# Altium PCB PowerSwitch.PcbDoc
Units mm, origin at the board's own origin, x right, y up, seen from the top; angles counter-clockwise.
Board outline 65 x 35 mm, 4 copper layers (Top Layer, GND Plane, Power Plane, Bottom Layer), stack 1.57 mm thick; 14 components, 13 nets, 41 pads, 5 vias.
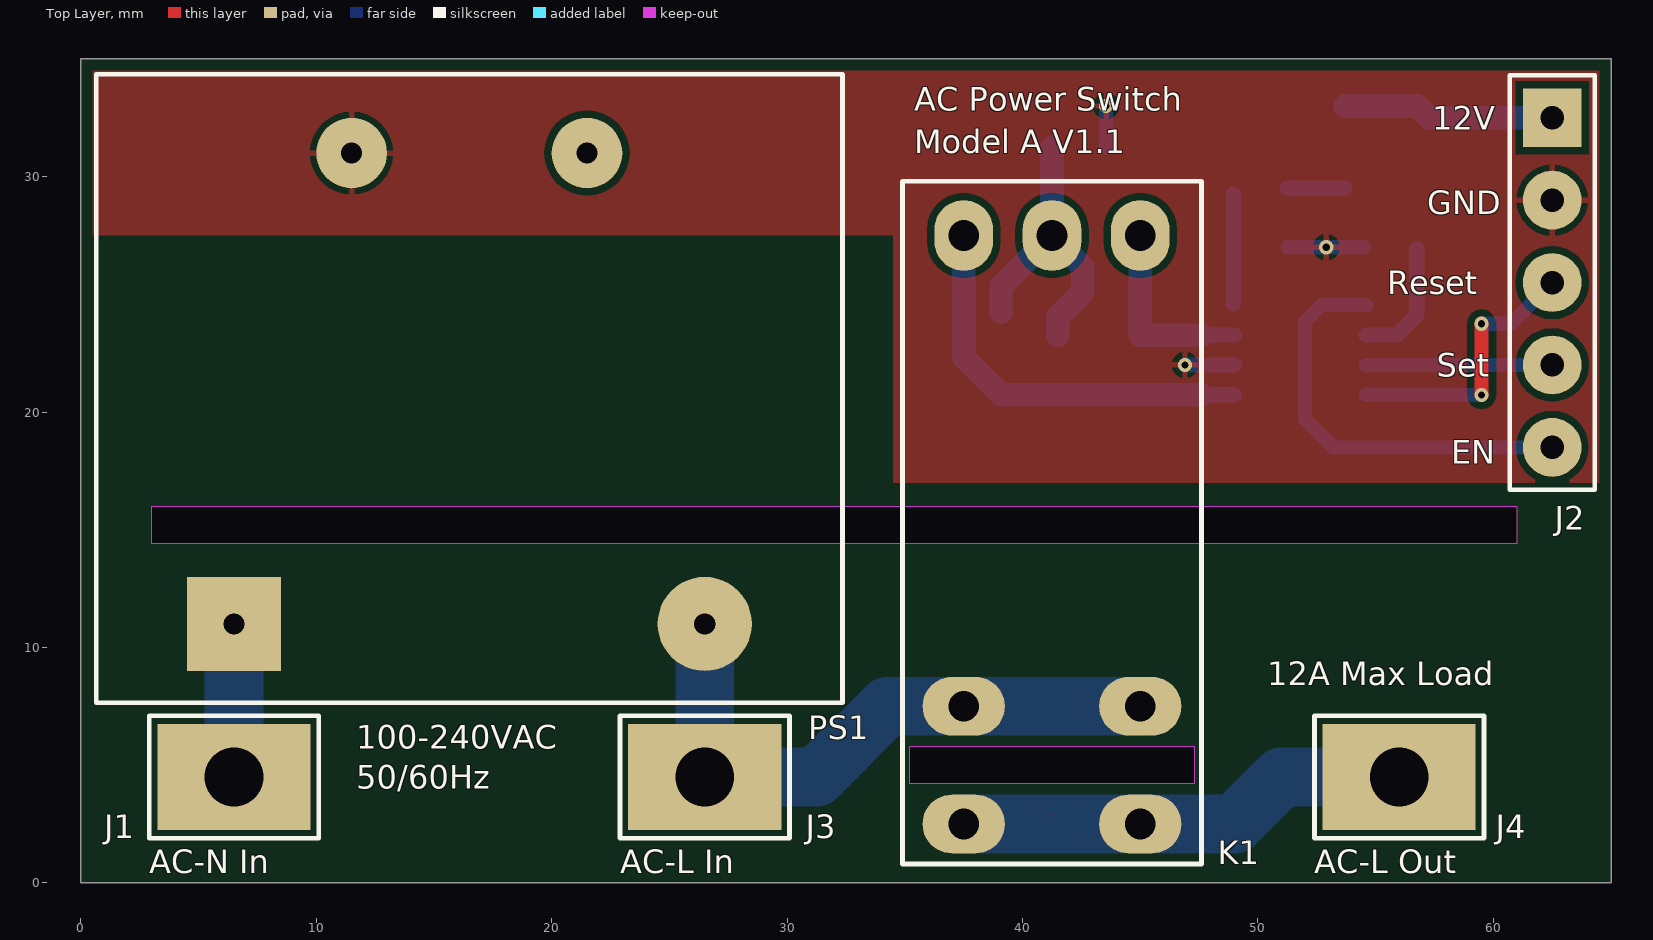
[diagram p0: Top Layer view]
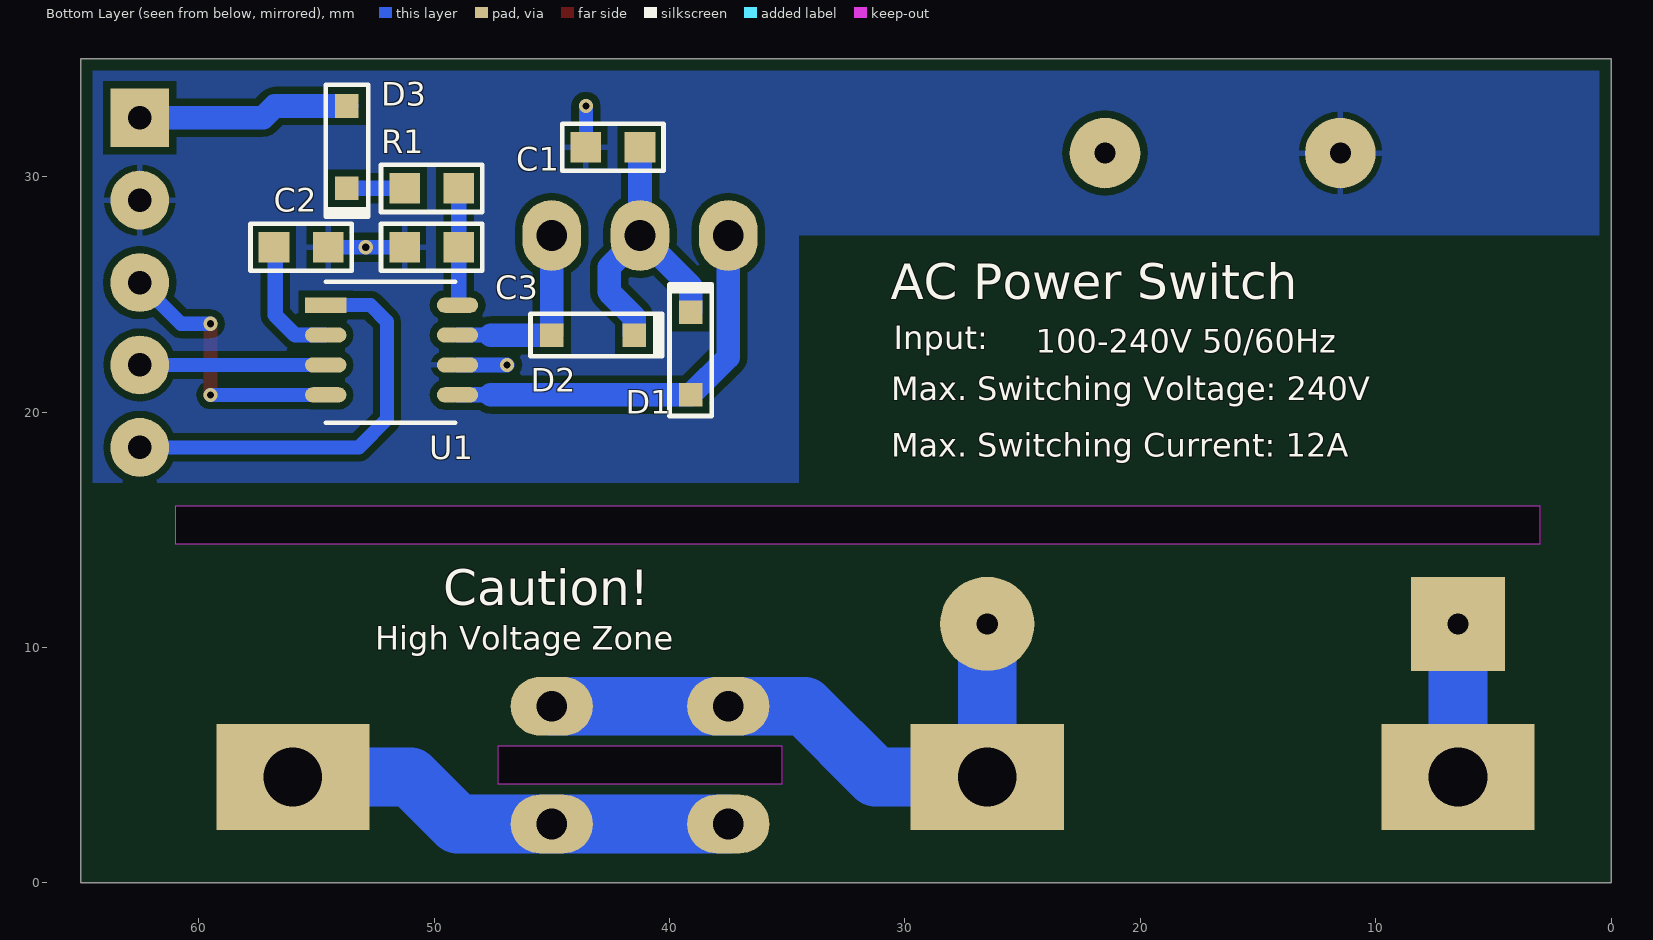
[diagram p1: Bottom Layer view, seen from below]
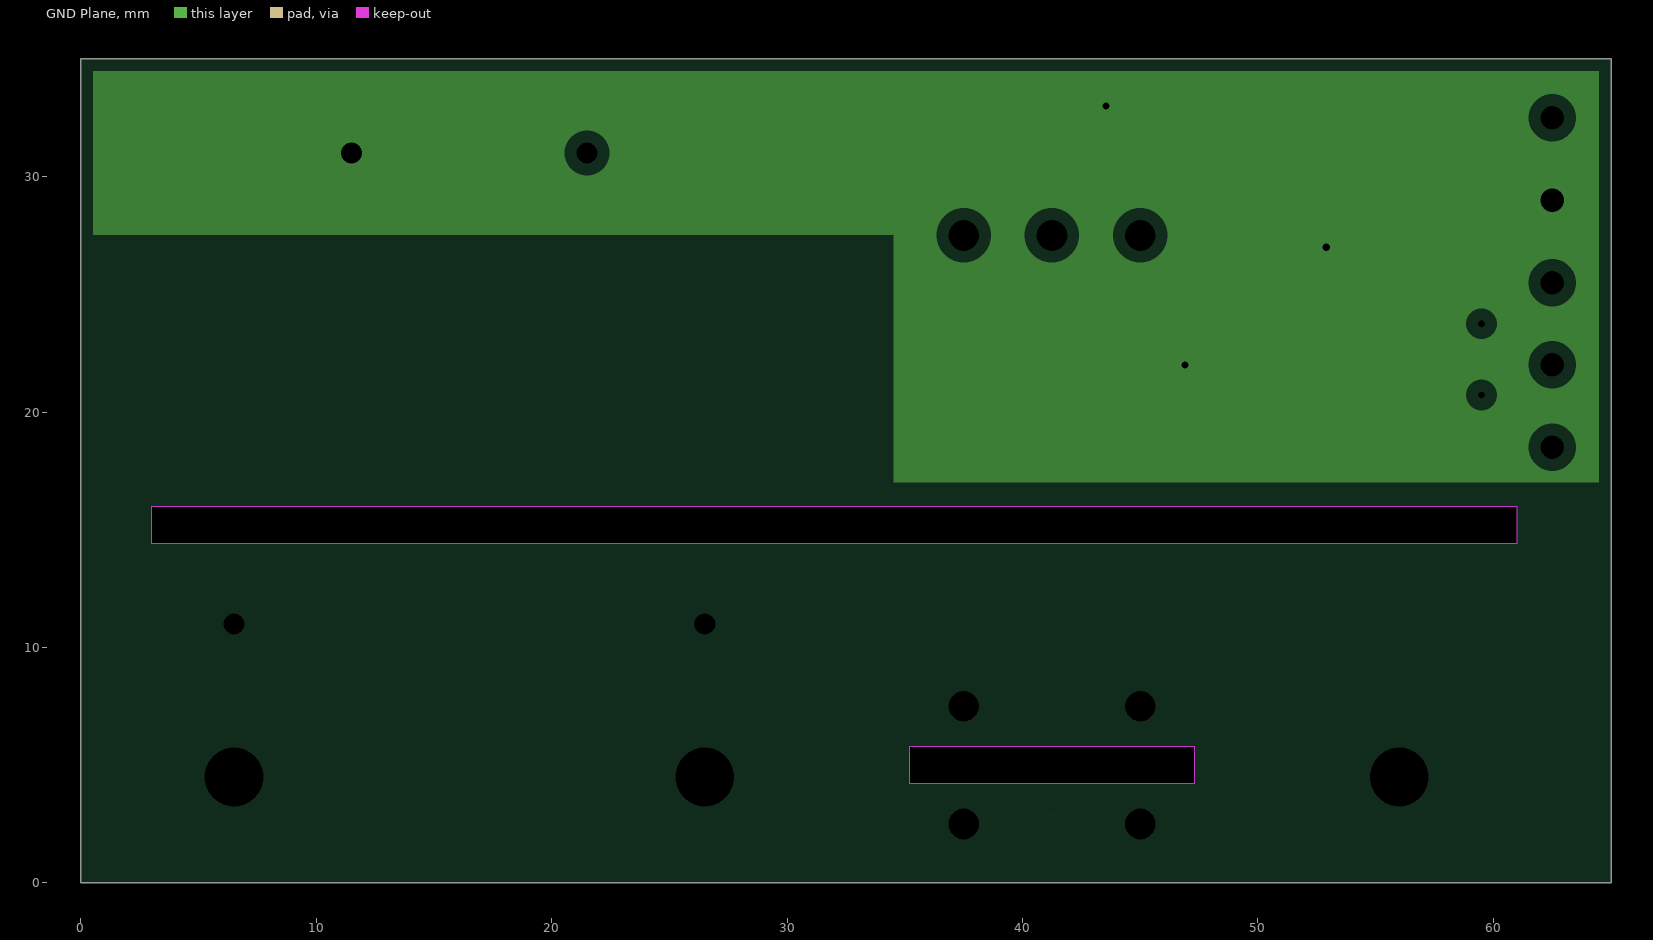
[diagram p2: GND Plane, clearances drawn from the general rule]
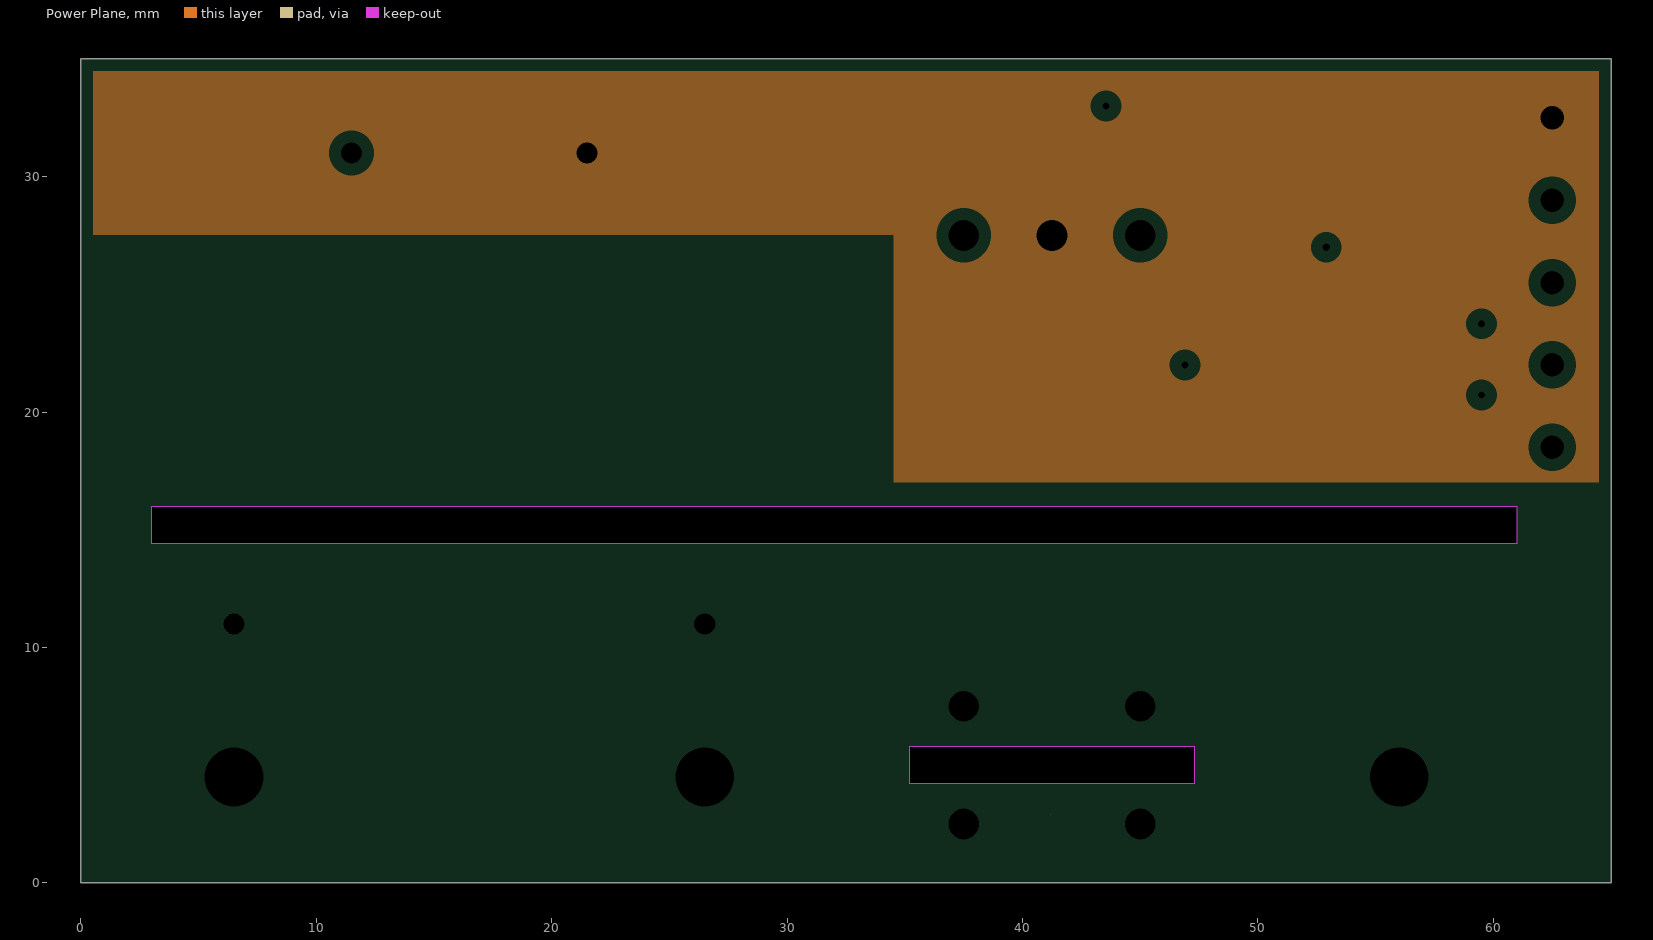
[diagram p3: Power Plane, clearances drawn from the general rule]
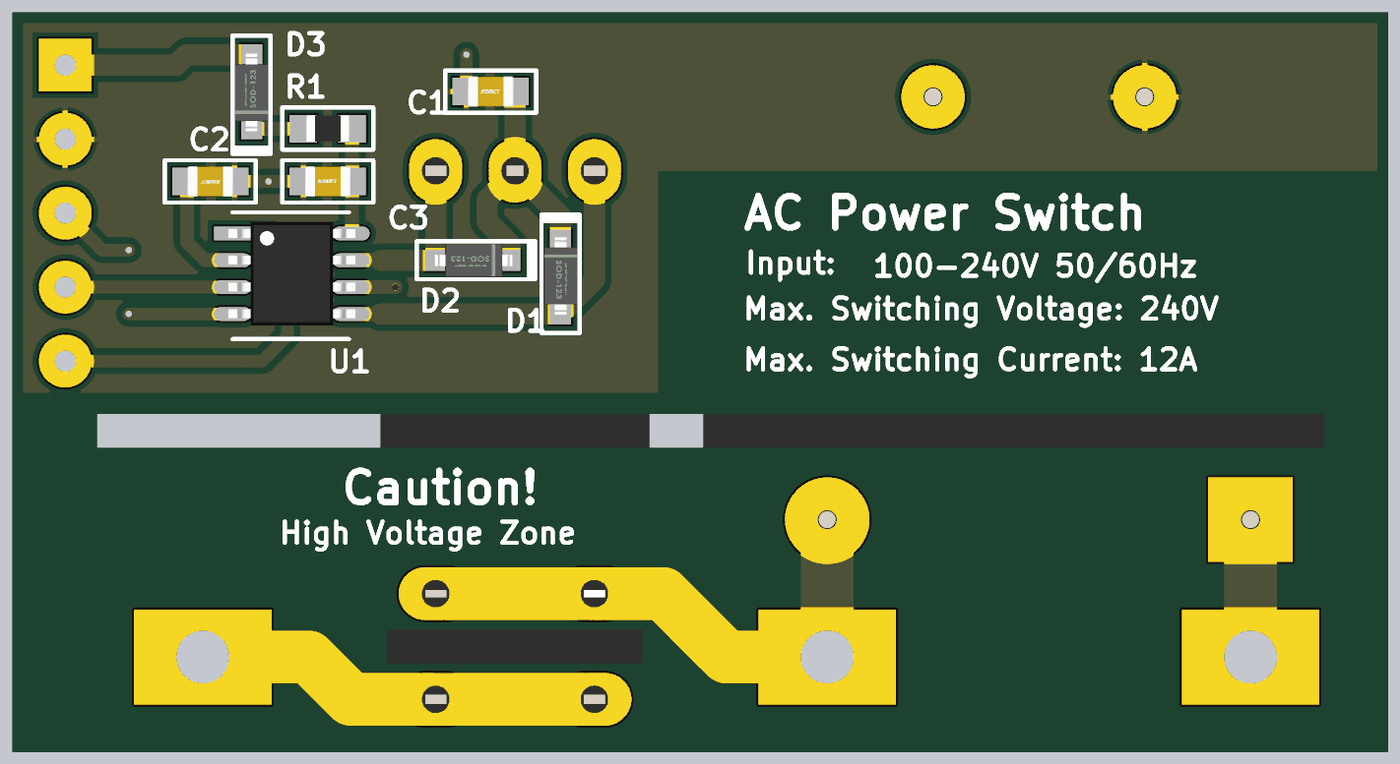
[diagram p4: 3D render of the assembled board from below, using the file's embedded part models]

## Layer stack, top to bottom
Top Solder: solder mask 0.0102, Solder Resist, Dk 3.5
Top Layer: signal copper 0.035
Prepreg 1: prepreg 0.2, FR-4, Dk 4.6
GND Plane: plane copper 0.0175, net GND
Core: dielectric 1.065, FR-4, Dk 4.6
Power Plane: plane copper 0.0175, net 12V
Prepreg 2: prepreg 0.2, FR-4, Dk 4.6
Bottom Layer: signal copper 0.035
Bottom Solder: solder mask 0.0102, Solder Resist, Dk 3.5

## Board outline
0,0 0,35 65,35 65,0
cut-out: 61,14.4 3,14.4 3,16 61,16
cut-out: 41.2,2.9
cut-out: 47.3,4.2 35.2,4.2 35.2,5.8 47.3,5.8

## Design rules (kind name [scope] priority, off if disabled: settings)
Clearance [All] p1: gap=0.3 ignorepadtopadclearanceinfootprint=FALSE
PlaneClearance [All] p1: clearance=0.508
PlaneConnect [All] p1: planeconnectstyle=Relief reliefexpansion=0.508 reliefentries=4 reliefconductorwidth=0.254 reliefairgap=0.254
PolygonConnect [All] p1: connectstyle=Relief reliefconductorwidth=0.254 reliefentries=4 polygonreliefangle="90 Angle" airgapwidth=0.254
RoutingVias [All] p1: holewidth=0.3 width=0.6 viastyle="Through Hole" minholewidth=0.3 minwidth=0.6 maxholewidth=0.3 maxwidth=0.6
SilkToSolderMaskClearance [IsPad] p1: minsilkscreentomaskgap=0.125 clearancetoexposedcopper=TRUE
SolderMaskExpansion [All] p1: expansion=0.102
Width [All] p1: maxlimit=2.5 minlimit=0.3 preferedwidth=0.5 toplayer_maxwidth=1 minimp=50.000000 maximp=50.000000 favimp=50.000000
27 further rules are at their usual default settings.

## Components (designator, comment, footprint, x,y, rotation, side; value= is the part's Value field where it differs from the comment)
C1 "10uF" C0805 43.55,31.25 r180 bottom
C2 "0.22uF" C0805 54.5,27 r0 bottom
C3 "1uF" C0805 51.25,27 r180 bottom
D1 "1N4148" 1N4148SOD123 39.1,24.23 r270 bottom
D2 "1N4148" 1N4148SOD123 41.5,23.27 r0 bottom
D3 "1N4148" 1N4148SOD123 53.7,29.5 r90 bottom
J1 "AC-N" AC-HEADER 6.5,4.5 r0 top
J2 "Ctrl_Header" CTRL-HEADER 62.5,32.5 r0 top
J3 "AC-L" AC-HEADER 26.5,4.5 r180 top
J4 "AC-L" AC-HEADER 56,4.5 r180 top
K1 "Latching_Relay" G5RL-K1A-E 37.5,27.5 r270 top
PS1 "AC_DC_Converter_12V_5W" RAC05-K/277 6.5,11 r90 top
R1 "10Ohms" R0805 48.95,29.5 r0 bottom
U1 "Relay_Driver" FAN324X 54.6,24.54 r180 bottom

## Footprints (in the part's own frame and the unit in brackets; to place one, negate y for a bottom-side part, rotate by r counter-clockwise, add the part's x,y. Pads: shape width x height; smd on the part's side, far side on the other; paste and mask are expansions set on the pad)
1N4148SOD123 [mm]
  rect 1x1 smd: 1(0,0) 2(3.5,0)
  silkscreen extent -1.2,-0.9 4.4,0.9, body extent -0.15,-0.8 3.55,0.8, height 1.16
AC-HEADER [mm] "AC Header"
  rect 6.5x4.5 hole 2.5: 1(0,0)
  silkscreen extent -3.6,-2.6 3.6,2.6
C0805 [mm]
  rect 1.3x1.3 smd: 1(0,0) 2(2.3,0)
  silkscreen extent -1,-1 3.3,1, body extent 0.05,-0.73 2.25,0.72, height 0.89
CTRL-HEADER [mm] "Controller Header"
  rect 2.5x2.5 hole 1: 1(0,0)
  round 2.5 hole 1: 2(0,-3.5) 3(0,-7) 4(0,-10.5) 5(0,-14)
  silkscreen extent -1.8,-15.8 1.8,1.8
FAN324X [mm]
  rect 1.75x0.65 smd: 1(0,0)
  oval 1.75x0.65 smd: 2(0,-1.27) 3(0,-2.54) 4(0,-3.81) 5(5.6,-3.81) 6(5.6,-2.54) 7(5.6,-1.27) 8(5.6,0)
  silkscreen extent 0,-5 5.5,1, body extent -0.2,-4.35 5.8,0.55, height 1.75
G5RL-K1A-E [mm] "Dual-Coil Letching Relay"
  oval 3x2.5 hole 1.3: 1(0,0) 8(0,7.5) 9(0,3.75)
  oval 2.5x3.5 hole 1.3: 3(20,0) 4(25,0) 5(25,7.5) 6(20,7.5)
  silkscreen extent -2.3,-2.6 26.7,10.1, body extent -2.3,-2.6 26.7,10.1, height 15.76
R0805 [mm]
  rect 1.3x1.3 smd: 1(0,0) 2(2.3,0)
  silkscreen extent -1,-1 3.3,1, body extent 0.15,-0.62 2.15,0.63, height 0.61
RAC05-K/277 [mm] "AC/DC Converter 5W"
  rect 4x4 hole 0.9: 1(0,0)
  round 4 hole 0.9: 5(0,-20)
  round 3 hole 0.9: 7(20,-15) 9(20,-5)
  silkscreen extent -3.35,-25.85 23.35,5.85, body extent -3.35,-25.85 23.35,5.85, height 21.96

## Part data
C1: library part CL21B106KOQNNNE, "10µF ±10% 16V Ceramic Capacitor X7R 0805 (2012 Metric)", Case/Package=0805, Case Code (Metric)=2012, Dielectric=X7R, Manufacturer=Samsung, Max Operating Temperature=125°C, Min Operating Temperature=-55°C, Package Quantity=1, Supplier Part Number 1=1276-2872-1-ND, Tolerance=10%, Voltage=16V, Capacitance=10uF, Case Code (Imperial)=0805, Category="Ceramic Capacitors", ComponentLink1Description=https://datasheet.ciiva.com/16428/cl21b106koqnnne-16428887.pdf?src-supplier=Future+Electronics, ComponentLink1URL=https://datasheet.ciiva.com/16428/cl21b106koqnnne-16428887.pdf?src-supplier=Future+Electronics, ComponentLink2Description=https://datasheet.ciiva.com/25794/cl21b106koqnnne-25794472.pdf?src-supplier=Digi-Key, ComponentLink2URL=https://datasheet.ciiva.com/25794/cl21b106koqnnne-25794472.pdf?src-supplier=Digi-Key, ComponentLink3Description=https://datasheet.ciiva.com/26920/getdatasheetpartid-355170-26920201.pdf?src-supplier=Verical, ComponentLink3URL=https://datasheet.ciiva.com/26920/getdatasheetpartid-355170-26920201.pdf?src-supplier=Verical, ComponentLink4Description=http://datasheet.octopart.com/CL21B106KOQNNNE-Samsung-Electro-Mechanics-datasheet-11806859.pdf?src-supplier=Arrow, ComponentLink4URL=http://datasheet.octopart.com/CL21B106KOQNNNE-Samsung-Electro-Mechanics-datasheet-11806859.pdf?src-supplier=Arrow, ComponentLink5Description=http://datasheet.octopart.com/CL21B106KOQNNNE-Samsung-Electro-Mechanics-datasheet-81462191.pdf?src-supplier=Future+Electronics, ComponentLink5URL=http://datasheet.octopart.com/CL21B106KOQNNNE-Samsung-Electro-Mechanics-datasheet-81462191.pdf?src-supplier=Future+Electronics, ComponentLink6Description=http://datasheet.octopart.com/CL21B106KOQNNNE-Samsung-Electro-Mechanics-datasheet-8324245.pdf, ComponentLink6URL=http://datasheet.octopart.com/CL21B106KOQNNNE-Samsung-Electro-Mechanics-datasheet-8324245.pdf, ComponentLink7Description=http://datasheet.octopart.com/CL21B106KOQNNNE-Samsung-Electro-Mechanics-datasheet-116891046.pdf?src-supplier=Future+Electronics, ComponentLink7URL=http://datasheet.octopart.com/CL21B106KOQNNNE-Samsung-Electro-Mechanics-datasheet-116891046.pdf?src-supplier=Future+Electronics, ComponentLink8Description=http://datasheet.octopart.com/CL21B106KOQNNNE-Samsung-Electro-Mechanics-datasheet-136482503.pdf?src-supplier=Future+Electronics, ComponentLink8URL=http://datasheet.octopart.com/CL21B106KOQNNNE-Samsung-Electro-Mechanics-datasheet-136482503.pdf?src-supplier=Future+Electronics, ComponentLink9Description=http://datasheet.octopart.com/CL21B106KOQNNNE-Samsung-datasheet-12530662.pdf?src-supplier=Future+Electronics, ComponentLink9URL=http://datasheet.octopart.com/CL21B106KOQNNNE-Samsung-datasheet-12530662.pdf?src-supplier=Future+Electronics, ComponentLink10Description=http://datasheet.octopart.com/CL21B106KOQNNNE-Samsung-datasheet-26669285.pdf?src-supplier=Future+Electronics, ComponentLink10URL=http://datasheet.octopart.com/CL21B106KOQNNNE-Samsung-datasheet-26669285.pdf?src-supplier=Future+Electronics, Contact Plating=Tin, Depth=1.25mm, Height=1.25mm, Length=2mm, Manufacturer Part Number=CL21B106KOQNNNE, Mount="Surface Mount", Packaging="Tape and Reel", Pricing 1="1 = 0.30000, 10 = 0.20700, 100 = 0.11730, 500 = 0.08280, 1000 = 0.07245 (USD)", Radiation Hardening=No, Stock 1=6166622, Supplier 1=Digi-Key, Thickness=0.055inch, Voltage Rating=16V, Width=0.049inch
C2: library part CGA4J2X7R1H224K125AE, "0.22µF ±10% 50V Ceramic Capacitor X7R 0805 (2012 Metric)", Capacitance=220nF, Case/Package=0805, Case Code (Metric)=2012, Manufacturer=TDK, Max Operating Temperature=125°C, Min Operating Temperature=-55°C, Ratings=AEC-Q200, Supplier Part Number 1=445-173771-1-ND, Tolerance=10%, Voltage Rating=50V, Case Code (Imperial)=0805, Category="Ceramic Capacitors", ComponentLink1Description=https://product.tdk.com/info/en/catalog/datasheets/mlcc_automotive_soft_en.pdf?src-supplier=Digi-Key, ComponentLink1URL=https://product.tdk.com/info/en/catalog/datasheets/mlcc_automotive_soft_en.pdf?src-supplier=Digi-Key, Features="Soft Termination", Length=0.079inch, Manufacturer Part Number=CGA4J2X7R1H224K125AE, Mount="Surface Mount", Packaging="Tape and Reel", Pricing 1="1 = 0.28000, 10 = 0.19000, 100 = 0.10790, 500 = 0.07618, 1000 = 0.06665 (USD)", Stock 1=7671, Supplier 1=Digi-Key, Thickness=0.059inch, Width=0.047inch
C3: library part CGA4J3X7R1V105K125AB, "1µF ±10% 35V Ceramic Capacitor X7R 0805 (2012 Metric)", Case/Package=0805, Case Code (Metric)=2012, Dielectric=X7R, Manufacturer=TDK, Max Operating Temperature=125°C, Min Operating Temperature=-55°C, Package Quantity=1, Ratings=AEC-Q200, Supplier Part Number 1=445-6962-1-ND, Tolerance=10%, Voltage Rating=35V, Capacitance=1uF, Case Code (Imperial)=0805, Category="Ceramic Capacitors", ComponentLink1Description=https://datasheet.ciiva.com/24219/cga4j3x7r1v105k125ab-266016-24219602.pdf?src-supplier=Mouser, ComponentLink1URL=https://datasheet.ciiva.com/24219/cga4j3x7r1v105k125ab-266016-24219602.pdf?src-supplier=Mouser, ComponentLink2Description=https://datasheet.ciiva.com/8081/1807242-8081445.pdf?src-supplier=Element14, ComponentLink2URL=https://datasheet.ciiva.com/8081/1807242-8081445.pdf?src-supplier=Element14, ComponentLink3Description=https://datasheet.ciiva.com/22703/1807242-22703021.pdf?src-supplier=Element14, ComponentLink3URL=https://datasheet.ciiva.com/22703/1807242-22703021.pdf?src-supplier=Element14, ComponentLink4Description=http://datasheet.octopart.com/CGA4J3X7R1V105K125AB-TDK-datasheet-13376850.pdf?src-supplier=Newark, ComponentLink4URL=http://datasheet.octopart.com/CGA4J3X7R1V105K125AB-TDK-datasheet-13376850.pdf?src-supplier=Newark, ComponentLink5Description=http://datasheet.octopart.com/CGA4J3X7R1V105K125AB-TDK-datasheet-12542526.pdf?src-supplier=Newark, ComponentLink5URL=http://datasheet.octopart.com/CGA4J3X7R1V105K125AB-TDK-datasheet-12542526.pdf?src-supplier=Newark, ComponentLink6Description=http://datasheet.octopart.com/CGA4J3X7R1V105K125AB-TDK-datasheet-33009218.pdf?src-supplier=Newark, ComponentLink6URL=http://datasheet.octopart.com/CGA4J3X7R1V105K125AB-TDK-datasheet-33009218.pdf?src-supplier=Newark, ComponentLink7Description=http://datasheet.octopart.com/CGA4J3X7R1V105K125AB-TDK-datasheet-43366117.pdf?src-supplier=Newark, ComponentLink7URL=http://datasheet.octopart.com/CGA4J3X7R1V105K125AB-TDK-datasheet-43366117.pdf?src-supplier=Newark, ComponentLink8Description=http://datasheet.octopart.com/CGA4J3X7R1V105K125AB-TDK-datasheet-17817449.pdf?src-supplier=Future+Electronics, ComponentLink8URL=http://datasheet.octopart.com/CGA4J3X7R1V105K125AB-TDK-datasheet-17817449.pdf?src-supplier=Future+Electronics, ComponentLink9Description=http://datasheet.octopart.com/CGA4J3X7R1V105K125AB-TDK-datasheet-13423859.pdf?src-supplier=Future+Electronics, ComponentLink9URL=http://datasheet.octopart.com/CGA4J3X7R1V105K125AB-TDK-datasheet-13423859.pdf?src-supplier=Future+Electronics, Composition=Ceramic, Depth=1.25mm, Height=1.25mm, Lead Free="Lead Free", Length=2mm, Manufacturer Part Number=CGA4J3X7R1V105K125AB, Mount="Surface Mount", Packaging="Tape and Reel", Pricing 1="1 = 0.29000, 10 = 0.20100, 100 = 0.12080, 500 = 0.09056, 1000 = 0.07648 (USD)", REACH SVHC="No SVHC", Stock 1=3137, Supplier 1=Digi-Key, Termination=SMD/SMT, Thickness=0.057inch, Voltage Rating (DC)=35V, Weight=0.000194oz, Width=1.25mm
D1 D2 D3: library part 1N4148W-7-F, "Small Signal Diode, Single, 100 V, 300 Ma, 1.25 V, 4 Ns, 2 A Rohs Compliant: Yes", Average Rectified Current=300mA, Capacitance=2pF, Current=15A, Current Rating=150mA, Forward Voltage=1.25V, Manufacturer="Diodes Inc.", Max Forward Surge Current (Ifsm)=2A, Max Operating Temperature=150°C, Max Repetitive Reverse Voltage (Vrrm)=100V, Min Operating Temperature=-65°C, Package Quantity=3000, Peak Reverse Current=1uA, Power Dissipation=400mW, Supplier Part Number 1=1N4148W-FDICT-ND, Voltage Rating (DC)=75V, ComponentLink1Description=https://datasheet.ciiva.com/911/ds30086-911734.pdf?src-supplier=Digi-Key, ComponentLink1URL=https://datasheet.ciiva.com/911/ds30086-911734.pdf?src-supplier=Digi-Key, ComponentLink2Description=https://datasheet.ciiva.com/911/ds30086-911735.pdf?src-supplier=Digi-Key, ComponentLink2URL=https://datasheet.ciiva.com/911/ds30086-911735.pdf?src-supplier=Digi-Key, ComponentLink3Description=https://datasheet.ciiva.com/22695/1915529-22695239.pdf?src-supplier=Element14, ComponentLink3URL=https://datasheet.ciiva.com/22695/1915529-22695239.pdf?src-supplier=Element14, ComponentLink4Description=https://datasheet.ciiva.com/911/ds30086-911736.pdf?src-supplier=Digi-Key, ComponentLink4URL=https://datasheet.ciiva.com/911/ds30086-911736.pdf?src-supplier=Digi-Key, ComponentLink5Description=https://datasheet.ciiva.com/1179/1915529-1179304.pdf?src-supplier=Element14, ComponentLink5URL=https://datasheet.ciiva.com/1179/1915529-1179304.pdf?src-supplier=Element14, ComponentLink6Description=https://datasheet.ciiva.com/4435/ds30086-4435128.pdf?src-supplier=Mouser, ComponentLink6URL=https://datasheet.ciiva.com/4435/ds30086-4435128.pdf?src-supplier=Mouser, ComponentLink7Description=https://datasheet.ciiva.com/8300/ds30086-8300392.pdf?src-supplier=Avnet, ComponentLink7URL=https://datasheet.ciiva.com/8300/ds30086-8300392.pdf?src-supplier=Avnet, ComponentLink8Description=https://datasheet.ciiva.com/25919/ds30086-25919609.pdf?src-supplier=Avnet+Europe, ComponentLink8URL=https://datasheet.ciiva.com/25919/ds30086-25919609.pdf?src-supplier=Avnet+Europe, ComponentLink9Description=https://datasheet.ciiva.com/15219/getdatasheetpartid-110030-15219548.pdf?src-supplier=Verical, ComponentLink9URL=https://datasheet.ciiva.com/15219/getdatasheetpartid-110030-15219548.pdf?src-supplier=Verical, ComponentLink10Description=https://datasheet.ciiva.com/8303/ds30086-8303197.pdf?src-supplier=Avnet, ComponentLink10URL=https://datasheet.ciiva.com/8303/ds30086-8303197.pdf?src-supplier=Avnet, ComponentLink11Description=http://datasheet.octopart.com/1N4148W-7-F-Diodes-Inc.-datasheet-8327071.pdf?src-supplier=Farnell, ComponentLink11URL=http://datasheet.octopart.com/1N4148W-7-F-Diodes-Inc.-datasheet-8327071.pdf?src-supplier=Farnell, ComponentLink12Description=http://datasheet.octopart.com/1N4148W-7-F-Diodes-Inc.-datasheet-8372061.pdf?src-supplier=Farnell, ComponentLink12URL=http://datasheet.octopart.com/1N4148W-7-F-Diodes-Inc.-datasheet-8372061.pdf?src-supplier=Farnell, ComponentLink13Description=http://datasheet.octopart.com/1N4148W-7-F-Diodes-Inc.-datasheet-12518151.pdf?src-supplier=Farnell, ComponentLink13URL=http://datasheet.octopart.com/1N4148W-7-F-Diodes-Inc.-datasheet-12518151.pdf?src-supplier=Farnell, ComponentLink14Description=http://datasheet.octopart.com/1N4148W-7-F-Diodes-Inc.-datasheet-46750349.pdf?src-supplier=Element14, ComponentLink14URL=http://datasheet.octopart.com/1N4148W-7-F-Diodes-Inc.-datasheet-46750349.pdf?src-supplier=Element14, ComponentLink15Description=http://datasheet.octopart.com/1N4148W-7-F-Diodes-Inc.-datasheet-65537886.pdf?src-supplier=Element14, ComponentLink15URL=http://datasheet.octopart.com/1N4148W-7-F-Diodes-Inc.-datasheet-65537886.pdf?src-supplier=Element14, ComponentLink16Description=http://datasheet.octopart.com/1N4148W-7-F-Diodes-Inc.-datasheet-34441418.pdf?src-supplier=Farnell, ComponentLink16URL=http://datasheet.octopart.com/1N4148W-7-F-Diodes-Inc.-datasheet-34441418.pdf?src-supplier=Farnell, ComponentLink17Description=http://datasheet.octopart.com/1N4148W-7-F-Diodes-Inc.-datasheet-81411345.pdf?src-supplier=Megastar, ComponentLink17URL=http://datasheet.octopart.com/1N4148W-7-F-Diodes-Inc.-datasheet-81411345.pdf?src-supplier=Megastar, ComponentLink18Description=http://datasheet.octopart.com/1N4148W-7-F-Diodes-Inc.-datasheet-40287.pdf?src-supplier=Mouser, ComponentLink18URL=http://datasheet.octopart.com/1N4148W-7-F-Diodes-Inc.-datasheet-40287.pdf?src-supplier=Mouser, ComponentLink19Description=http://datasheet.octopart.com/1N4148W-7-F-Diodes-Inc.-datasheet-131508.pdf?src-supplier=Digi-Key, ComponentLink19URL=http://datasheet.octopart.com/1N4148W-7-F-Diodes-Inc.-datasheet-131508.pdf?src-supplier=Digi-Key, ComponentLink20Description=http://datasheet.octopart.com/1N4148W-7-F-Diodes-Inc.-datasheet-11856225.pdf?src-supplier=Arrow, ComponentLink20URL=http://datasheet.octopart.com/1N4148W-7-F-Diodes-Inc.-datasheet-11856225.pdf?src-supplier=Arrow, ComponentLink21Description=http://datasheet.octopart.com/1N4148W-7-F-Diodes-Inc.-datasheet-14053747.pdf?src-supplier=IIIC, ComponentLink21URL=http://datasheet.octopart.com/1N4148W-7-F-Diodes-Inc.-datasheet-14053747.pdf?src-supplier=IIIC, Contact Plating=Tin, Element Configuration=Single, Forward Current=150mA, Height=1.25mm, Lead Free="Lead Free", Length=2.85mm, Manufacturer Part Number=1N4148W-7-F, Max Reverse Voltage (DC)=100V, Max Surge Current=2A, Mount="Surface Mount", Number of Pins=2, Output Current=150mA, Packaging="Tape and Reel", Peak Non-Repetitive Surge Current=2A, Polarity=Standard, Power Rating=400mW, Pricing 1="1 = 0.16000, 10 = 0.14900, 100 = 0.08100, 500 = 0.04986, 1000 = 0.03399 (USD)", Radiation Hardening=No, REACH SVHC="No SVHC", Recovery Time=4ns, Reverse Recovery Time=4ns, Stock 1=6304285, Supplier 1=Digi-Key, Voltage=100V, Weight=0.000353oz, Width=1.7mm
J1: library part AC-N-Header
J2: library part Ctrl-Header
J3 J4: library part AC-L-Header
K1: library part G5RL-K1A-E-DC12, "General Purpose Relay, G5rl-K Series, Power, Latching Dual Coil, Spst-No, 12 Vdc, 16 A", Coil Current=62.5mA, Coil Power=750mW, Coil Resistance=192R, Coil Voltage (DC)=12V, Contact Current Rating=16A, Manufacturer=Omron, Max Operating Temperature=85°C, Min Operating Temperature=-40°C, Package Quantity=100, Supplier Part Number 1=Z4393-ND, Category=Relays, Coil Type="Latching, Dual Coil", ComponentLink1Description=http://www.farnell.com/datasheets/1836111.pdf?src-supplier=Farnell, ComponentLink1URL=http://www.farnell.com/datasheets/1836111.pdf?src-supplier=Farnell, ComponentLink2Description=http://www.mouser.com/ds/2/307/en-g5rl-531959.pdf?src-supplier=Mouser, ComponentLink2URL=http://www.mouser.com/ds/2/307/en-g5rl-531959.pdf?src-supplier=Mouser, ComponentLink3Description=https://omronfs.omron.com/en_US/ecb/products/pdf/en-g5rl_uk.pdf?src-supplier=Digi-Key, ComponentLink3URL=https://omronfs.omron.com/en_US/ecb/products/pdf/en-g5rl_uk.pdf?src-supplier=Digi-Key, ComponentLink4Description=http://datasheet.octopart.com/G5RLK1AEDC12-Omron-datasheet-28360223.pdf?src-supplier=TME, ComponentLink4URL=http://datasheet.octopart.com/G5RLK1AEDC12-Omron-datasheet-28360223.pdf?src-supplier=TME, Contact Material=Silver, Manufacturer Part Number=G5RL-K1A-E-DC12, Mount="Through Hole", Operate Time=15ms, Packaging=Rail/Tube, Pricing 1="1 = 3.91000, 10 = 3.66600, 25 = 3.25880, 50 = 3.09580, 100 = 2.93280, 300 = 2.60697, 500 = 2.44404, 1000 = 2.28110 (USD)", REACH SVHC="No SVHC", Relay Type="General Purpose", Release Time=15ms, Stock 1=423, Supplier 1=Digi-Key, Termination="PC Pin", Throw Configuration=SPST
PS1: library part RAC05-12SK/277, "Enclosed AC DC Converter 1 Output 12V    416mA 85 ~ 305 VAC, 120 ~ 430 VDC Input", Manufacturer="Recom Power", Supplier Part Number 1=945-3192-ND, Category="AC DC Converters", ComponentLink1Description=http://datasheet.octopart.com/RAC05-12SK-277-Recom-Power-datasheet-133924409.pdf?src-supplier=Recom+Power, ComponentLink1URL=http://datasheet.octopart.com/RAC05-12SK-277-Recom-Power-datasheet-133924409.pdf?src-supplier=Recom+Power, Manufacturer Part Number=RAC05-12SK/277, Pricing 1="1 = 10.15000, 5 = 10.00600, 12 = 9.86000, 36 = 9.28000, 60 = 8.99000, 108 = 8.70000, 252 = 8.41000, 504 = 8.12000 (USD)", Stock 1=70, Supplier 1=Digi-Key
R1: library part CRCW080510R0FKEAC, "10 Ohms ±1% 0.125W, 1/8W Chip Resistor 0805 (2012 Metric)  Thick Film", Case/Package=Molded, Manufacturer=Vishay, Max Operating Temperature=155°C, Min Operating Temperature=-55°C, Power Rating=125mW, Resistance=10R, Supplier Part Number 1=541-4132-1-ND, Temperature Coefficient=100ppm/°C, Tolerance=1%, Category="Chip Resistor - Surface Mount", ComponentLink1Description=http://www.vishay.com/docs/20035/dcrcwe3.pdf?src-supplier=Avnet+Asia, ComponentLink1URL=http://www.vishay.com/docs/20035/dcrcwe3.pdf?src-supplier=Avnet+Asia, ComponentLink2Description=http://www.vishay.com/docs/20035/dcrcwe3.pdf?src-supplier=Avnet, ComponentLink2URL=http://www.vishay.com/docs/20035/dcrcwe3.pdf?src-supplier=Avnet, ComponentLink3Description=http://www.vishay.com/docs/28773/crcwce3.pdf?src-supplier=Digi-Key, ComponentLink3URL=http://www.vishay.com/docs/28773/crcwce3.pdf?src-supplier=Digi-Key, Composition="Thick Film", Contact Plating=Tin, Lead Free="Lead Free", Length=2mm, Manufacturer Part Number=CRCW080510R0FKEAC, Mount="Surface Mount", Pricing 1="1 = 0.10000, 10 = 0.06300, 100 = 0.02560, 1000 = 0.01149, 2500 = 0.00997 (USD)", Stock 1=351996, Supplier 1=Digi-Key, Termination=Wraparound
U1: library part FAN3240TMX, "FAN3240TMX, Dual-Channel Latching Relay Driver", Case/Package=SOIC, Color=Black, Current=5mA, Manufacturer="ON Semiconductor", Max Operating Temperature=105°C, Max Output Current=1A, Max Output Voltage=60V, Max Supply Current=600uA, Min Operating Temperature=-40°C, Min Supply Voltage=8V, Nominal Supply Current=400uA, On-State Resistance=1R, Package Quantity=100, Supplier Part Number 1=FAN3240TMXCT-ND, Category="Integrated Circuits (ICs)", ComponentLink1Description=https://datasheet.ciiva.com/14940/fan3240-14940148.pdf?src-supplier=Digi-Key, ComponentLink1URL=https://datasheet.ciiva.com/14940/fan3240-14940148.pdf?src-supplier=Digi-Key, ComponentLink2Description=https://datasheet.ciiva.com/29985/fan3241-29985974.pdf?src-supplier=Avnet, ComponentLink2URL=https://datasheet.ciiva.com/29985/fan3241-29985974.pdf?src-supplier=Avnet, ComponentLink3Description=https://datasheet.ciiva.com/12217/fan3241-221700-12217195.pdf?src-supplier=Mouser, ComponentLink3URL=https://datasheet.ciiva.com/12217/fan3241-221700-12217195.pdf?src-supplier=Mouser, ComponentLink4Description=https://datasheet.ciiva.com/14940/fan3240-14940149.pdf?src-supplier=Digi-Key, ComponentLink4URL=https://datasheet.ciiva.com/14940/fan3240-14940149.pdf?src-supplier=Digi-Key, ComponentLink5Description=http://datasheet.octopart.com/FAN3240TMX-ON-Semiconductor-datasheet-85445215.pdf?src-supplier=ON+Semiconductor, ComponentLink5URL=http://datasheet.octopart.com/FAN3240TMX-ON-Semiconductor-datasheet-85445215.pdf?src-supplier=ON+Semiconductor, ComponentLink6Description=http://datasheet.octopart.com/FAN3240TMX-ON-Semiconductor-datasheet-86690032.pdf?src-supplier=ON+Semiconductor, ComponentLink6URL=http://datasheet.octopart.com/FAN3240TMX-ON-Semiconductor-datasheet-86690032.pdf?src-supplier=ON+Semiconductor, ComponentLink7Description=http://datasheet.octopart.com/FAN3240TMX-Fairchild-Semiconductor-datasheet-15994581.pdf, ComponentLink7URL=http://datasheet.octopart.com/FAN3240TMX-Fairchild-Semiconductor-datasheet-15994581.pdf, ComponentLink8Description=http://datasheet.octopart.com/FAN3240TMX-ON-Semiconductor-datasheet-30893411.pdf?src-supplier=Fairchild+Semiconductor, ComponentLink8URL=http://datasheet.octopart.com/FAN3240TMX-ON-Semiconductor-datasheet-30893411.pdf?src-supplier=Fairchild+Semiconductor, ComponentLink9Description=http://sigma.octopart.com/17345426/technical_drawing/Fairchild-Semiconductor-FAN3240TMX.pdf?src-supplier=Fairchild+Semiconductor, ComponentLink9URL=http://sigma.octopart.com/17345426/technical_drawing/Fairchild-Semiconductor-FAN3240TMX.pdf?src-supplier=Fairchild+Semiconductor, ComponentLink10Description=http://sigma.octopart.com/33068652/technical_drawing/Fairchild-Semiconductor-FAN3240TMX.pdf?src-supplier=Fairchild+Semiconductor, ComponentLink10URL=http://sigma.octopart.com/33068652/technical_drawing/Fairchild-Semiconductor-FAN3240TMX.pdf?src-supplier=Fairchild+Semiconductor, Diameter=0.5inch, Height=0.625inch, Lead Free="Lead Free", Length=4.9mm, Manufacturer Part Number=FAN3240TMX, Material=Metal, Max Supply Voltage=60V, Mount="Surface Mount", Number of Drivers=2, Number of Outputs=2, Number of Pins=8, Output Current=5mA, Output Voltage=60V, Packaging="Tape and Reel", Plating=Tin, Pricing 1="1 = 1.55000, 10 = 1.38300, 100 = 1.07790, 500 = 0.89044, 1000 = 0.70298 (USD)", Radiation Hardening=No, Stock 1=3644, Supplier 1=Digi-Key, Termination=Crimp, Voltage=60V, Weight=0.2304g, Width=3.9mm, Wire Gauge (Max)=18AWG, Wire Gauge (Min)=14AWG

## Via types
v1: diameter 0.6, hole 0.3, Top Layer to Bottom Layer, tented both sides, 5 vias

## Nets (pads, with @x,y where several pads share a name; then routed paths per layer and width w, separated by ;. In a path a pad name is that pad's centre, name@x,y a point inside that pad or via, vN(x,y) a via of type N, cw(c..) or ccw(c..) an arc to the next point about the centre after c; other vN are vias at no path point)
5VB: C2.2 U1.2 | length 5.4
  Bottom Layer w0.5: C2.2@56.75,26.95 C2.2@56.765,26.965
  Bottom Layer w0.65: U1.2 55.9,23.27 56.75,24.12 C2.2@56.75,26.95
12V: C1.2 D1.1 D2.1 D3.2 J2.1 K1.9 PS1.7 | length 22.3
  Bottom Layer w0.5: K1.9@41.25,27.467 K1.9
  Bottom Layer w0.65: D3.2 D3.2@53.827,32.873
  Bottom Layer w1: D1.1 39.1,25.35 K1.9 C1.2 ; K1.9@41.25,27.467 42.566,26.152 42.566,25.1 41.5,24.034 D2.1 ; D3.2 56.765,33 57.265,32.5 J2.1
AC_L_In: J3.1 K1.3 K1.6 PS1.5 | length 26.2
  Bottom Layer w2.5: PS1.5 J3.1 31.25,4.5 34.25,7.5 K1.3 K1.6
AC_L_Out: J4.1 K1.4 K1.5 | length 19.3
  Bottom Layer w2.5: K1.4 K1.5 49,2.5 51,4.5 J4.1
AC_N_In: J1.1 PS1.1 | length 6.5
  Bottom Layer w2.5: J1.1 PS1.1
GND: C1.1 C2.1 C3.1 J2.2 PS1.9 U1.6 | length 7.1
  Bottom Layer w0.6: C1.1 v1(43.55,33) ; C3.1 v1(52.9,27) C2.1
  Bottom Layer w0.65: v1(46.9,22) U1.6
NetD3_1: D3.1 R1.2 | length 2.5
  Bottom Layer w0.65: R1.2 D3.1
Relay_Close: D2.2 K1.8 U1.7 | length 8.2
  Bottom Layer w0.65: 47.6,23.27 U1.7
  Bottom Layer w1: K1.8 D2.2 47.6,23.27
Relay_Driver_VS: C3.2 R1.1 U1.8 | length 4.7
  Bottom Layer w0.5: U1.8@48.95,24.59 U1.8
  Bottom Layer w0.65: U1.8@48.95,24.59 C3.2 R1.1@48.95,29.25
Relay_Open: D1.2 K1.1 U1.5 | length 17.3
  Bottom Layer w0.65: 47.6,20.73 U1.5
  Bottom Layer w1: K1.1 37.5,22.33 D1.2 47.6,20.73
Switch_EN: J2.5 U1.1 | length 18
  Bottom Layer w0.5: U1.1@54.589,24.529 U1.1
  Bottom Layer w0.6: U1.1 52.706,24.54 52,23.834 52,19.7 53.2,18.5 J2.5
Switch_Reset: J2.3 U1.4 | length 11.6
  Top Layer w0.6: v1(59.5,20.73) v1(59.5,23.75)
  Bottom Layer w0.6: U1.4 v1(59.5,20.73) ; v1(59.5,23.75) 60.75,23.75 J2.3
Switch_Set: J2.4 U1.3 | length 7.9
  Bottom Layer w0.6: U1.3 J2.4

## Polygon pours and split planes (outlines as drawn)
GND on Bottom Layer "Bottom Layer-GND" (solid, pour order 0): 0.5,34.5 0.5,27.5 34.5,27.5 34.5,17 59,17 64.5,17 64.5,34.5
GND on Top Layer "Top Layer-GND" (solid, pour order 2): 0.5,27.5 0.5,34.5 64.5,34.5 64.5,17 59,17 34.5,17 34.5,27.5
GND on GND Plane (split plane): 64.49,17 34.5,17 34.5,27.5 0.51,27.5 0.51,34.49 64.49,34.49
12V on Power Plane (split plane): 64.49,17 34.5,17 34.5,27.5 0.51,27.5 0.51,34.49 64.49,34.49

## Other copper
Bottom Layer:
  region: 48.084,5.5
GND Plane (plane layer: these items are gaps in the copper):
  pour cut-out: 0,0 0,27.5 34.5,27.5 34.5,17 65,17 65,0
Power Plane (plane layer: these items are gaps in the copper):
  pour cut-out: 0,0 0,27.5 34.5,27.5 34.5,17 65,17 65,0

## Silkscreen, mask and mechanical layers (free items; w line width, h text height)
Top Overlay:
  text "AC Power Switch" at 35.4,32.8 h1
  text "12V" at 57.4,32 h1
  text "Model A V1.1" at 35.4,31 h1
  text "GND" at 57.2,28.4 h1
  text "Reset" at 55.5,25 h1
  text "Set" at 57.6,21.5 h1
  text "EN" at 58.2,17.8 h1
  text "12A Max Load" at 50.4,8.4 h1
  text "100-240VAC" at 11.7,5.7 h1
  text "50/60Hz" at 11.7,4 h1
  text "AC-N In" at 2.9,0.4 h1
  text "AC-L In" at 22.9,0.4 h1
  text "AC-L Out" at 52.4,0.4 h1
Bottom Overlay:
  text "AC Power Switch" at 30.6,24.8 h1.5
  text "Input:" at 30.475,22.675 h1
  text "100-240V 50/60Hz" at 24.45,22.525 h1
  text "Max. Switching Voltage: 240V" at 30.575,20.5 h1
  text "Max. Switching Current: 12A" at 30.575,18.1 h1
  text "Caution!" at 49.6,11.8 h1.5
  text "High Voltage Zone" at 52.5,9.9 h1
Bottom Solder:
  lines w2.5: 26.5,4.5 31.25,4.5 34.25,7.5 37.5,7.5 45,7.5 ; 37.5,2.5 45,2.5 49,2.5 51,4.5 56,4.5
Board Outline:
  lines w0.2: 0,0 0,35 65,35 65,0 0,0 ; 3,14.4 61,14.4 61,16 3,16 3,14.4 ; 35.2,4.2 47.3,4.2 47.3,5.8 35.2,5.8 35.2,4.2